# EAGLE board Regulator board_V1.0_Tiled (EAGLE 7.7.0)
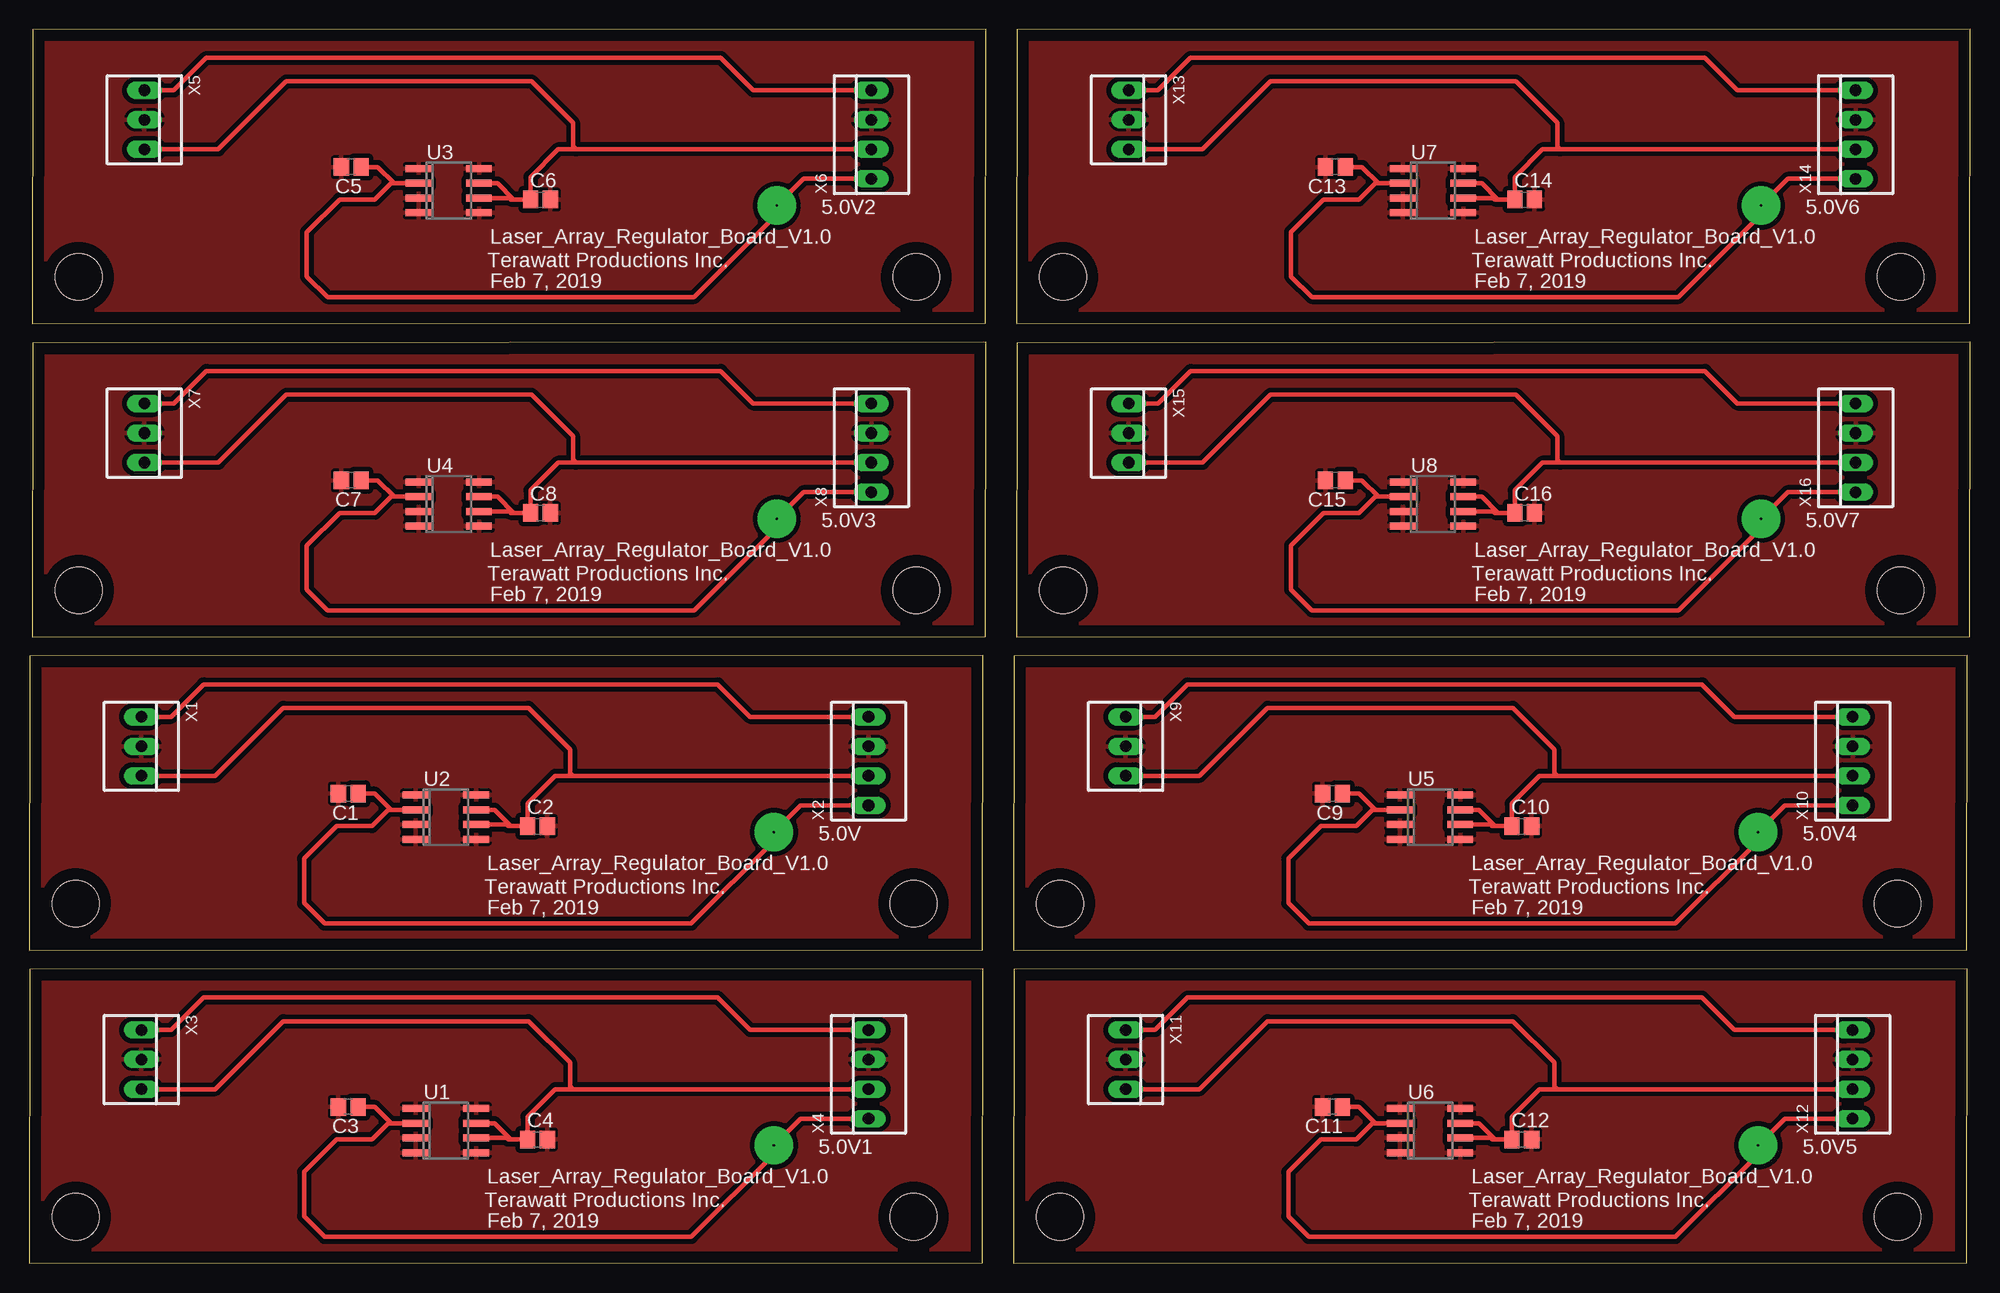
[diagram p0: board, top side]

Size 166.83 x 106.1 mm. Coordinates in mm from the lower left corner, seen from the top.
Outline: 0,26.92 81.92,26.97 82,52.25 0.08,52.2 0,26.92
Outline: 0,0 81.92,0.05 82,25.32 0.08,25.27 0,0
Outline: 0.25,80.77 82.17,80.82 82.25,106.1 0.33,106.04 0.25,80.77
Outline: 0.25,53.85 82.17,53.9 82.25,79.17 0.33,79.12 0.25,53.85
Outline: 84.58,26.92 166.5,26.97 166.58,52.25 84.66,52.2 84.58,26.92
Outline: 84.58,0 166.5,0.05 166.58,25.32 84.66,25.27 84.58,0
Outline: 84.84,80.77 166.76,80.82 166.83,106.1 84.91,106.04 84.84,80.77
Outline: 84.84,53.85 166.76,53.9 166.83,79.17 84.91,79.12 84.84,53.85
Copper layers (1*16): Top 0.035mm / dielectric 1.5mm / Bottom 0.035mm
Design rules "default *": minimum track width 10mil, minimum drill 24mil, track to track 16mil, track to pad 14mil, pad to pad 14mil, via to via 14mil, smd to smd 14mil, copper to edge 40mil, drill to drill 8mil, minimum pad ring 10mil, minimum via ring 8mil, stop-mask expansion 4mil, vias tented up to drill 0mil, thermal gap 10mil
Holes 4 mm at 4.01,30.94 76,30.94 4.01,4.01 76,4.01 4.27,84.79 76.25,84.79 4.27,57.86 76.25,57.86 88.6,30.94 160.58,30.94 88.6,4.01 160.58,4.01 88.85,84.79 160.83,84.79 88.85,57.86 160.83,57.86

## Footprints (pad centres in the part's own frame; a part is rotated, then mirrored left to right if it is on the bottom)
CONTACT-2MM = drill 0.2 pad 3.3: 1 0,0
C0805 = smd 1.3 x 1.5: 1 -0.85,0; 2 0.85,0
SOIC8 = smd 0.6 x 2.2: 1 -1.905,-2.6; 2 -0.635,-2.6; 3 0.635,-2.6; 4 1.905,-2.6; 5 1.905,2.6; 6 0.635,2.6; 7 -0.635,2.6; 8 -1.905,2.6
22-23-2031 = drill 1 long: 1 -2.54,0; 2 0,0; 3 2.54,0
22-23-2041 = drill 1 long: 1 -3.81,0; 2 -1.27,0; 3 1.27,0; 4 3.81,0

## Placement (x,y rotation side)
5.0V  CONTACT-2MM  [CONTACT-2MM]  64.01,37.08 0 top
5.0V1  CONTACT-2MM  [CONTACT-2MM]  64.01,10.16 0 top
5.0V2  CONTACT-2MM  [CONTACT-2MM]  64.26,90.93 0 top
5.0V3  CONTACT-2MM  [CONTACT-2MM]  64.26,64.01 0 top
5.0V4  CONTACT-2MM  [CONTACT-2MM]  148.59,37.08 0 top
5.0V5  CONTACT-2MM  [CONTACT-2MM]  148.59,10.16 0 top
5.0V6  CONTACT-2MM  [CONTACT-2MM]  148.84,90.93 0 top
5.0V7  CONTACT-2MM  [CONTACT-2MM]  148.84,64.01 0 top
C1  1uF  [C0805]  27.43,40.39 180 top
C2  1uF  [C0805]  43.69,37.59 0 top
C3  1uF  [C0805]  27.43,13.46 180 top
C4  1uF  [C0805]  43.69,10.67 0 top
C5  1uF  [C0805]  27.69,94.23 180 top
C6  1uF  [C0805]  43.94,91.44 0 top
C7  1uF  [C0805]  27.69,67.31 180 top
C8  1uF  [C0805]  43.94,64.52 0 top
C9  1uF  [C0805]  112.01,40.39 180 top
C10  1uF  [C0805]  128.27,37.59 0 top
C11  1uF  [C0805]  112.01,13.46 180 top
C12  1uF  [C0805]  128.27,10.67 0 top
C13  1uF  [C0805]  112.27,94.23 180 top
C14  1uF  [C0805]  128.52,91.44 0 top
C15  1uF  [C0805]  112.27,67.31 180 top
C16  1uF  [C0805]  128.52,64.52 0 top
U1  VOLTAGE_REG_APD1154ADL  [SOIC8]  35.81,11.43 270 top
U2  VOLTAGE_REG_APD1154ADL  [SOIC8]  35.81,38.35 270 top
U3  VOLTAGE_REG_APD1154ADL  [SOIC8]  36.07,92.2 270 top
U4  VOLTAGE_REG_APD1154ADL  [SOIC8]  36.07,65.28 270 top
U5  VOLTAGE_REG_APD1154ADL  [SOIC8]  120.4,38.35 270 top
U6  VOLTAGE_REG_APD1154ADL  [SOIC8]  120.4,11.43 270 top
U7  VOLTAGE_REG_APD1154ADL  [SOIC8]  120.65,92.2 270 top
U8  VOLTAGE_REG_APD1154ADL  [SOIC8]  120.65,65.28 270 top
X1  22-23-2031  [22-23-2031]  9.65,44.45 270 top
X2  22-23-2041  [22-23-2041]  72.14,43.18 90 top
X3  22-23-2031  [22-23-2031]  9.65,17.53 270 top
X4  22-23-2041  [22-23-2041]  72.14,16.26 90 top
X5  22-23-2031  [22-23-2031]  9.91,98.3 270 top
X6  22-23-2041  [22-23-2041]  72.39,97.03 90 top
X7  22-23-2031  [22-23-2031]  9.91,71.37 270 top
X8  22-23-2041  [22-23-2041]  72.39,70.1 90 top
X9  22-23-2031  [22-23-2031]  94.23,44.45 270 top
X10  22-23-2041  [22-23-2041]  156.72,43.18 90 top
X11  22-23-2031  [22-23-2031]  94.23,17.53 270 top
X12  22-23-2041  [22-23-2041]  156.72,16.26 90 top
X13  22-23-2031  [22-23-2031]  94.49,98.3 270 top
X14  22-23-2041  [22-23-2041]  156.97,97.03 90 top
X15  22-23-2031  [22-23-2031]  94.49,71.37 270 top
X16  22-23-2041  [22-23-2041]  156.97,70.1 90 top

## Library data of the parts
5.0V 5.0V1-5.0V7 U1-U8 = Mine
C1-C16 = adafruit
X1 X3 X5 X7 X9 X11 X13 X15 = Mine; MF: MOLEX; MPN: 22-23-2031; OC_FARNELL: 1462950; OC_NEWARK: 30C0862
X2 X4 X6 X8 X10 X12 X14 X16 = Mine; MF: MOLEX; MPN: 22-23-2041; OC_FARNELL: 1462920; OC_NEWARK: 38C0355

## Nets
GND: C1.2 C2.2 U2.1 U2.3 U2.4 U2.5 U2.8 X1.2 X2.3
GND1: C3.2 C4.2 U1.1 U1.3 U1.4 U1.5 U1.8 X3.2 X4.3
GND2: C5.2 C6.2 U3.1 U3.3 U3.4 U3.5 U3.8 X5.2 X6.3
GND3: C7.2 C8.2 U4.1 U4.3 U4.4 U4.5 U4.8 X7.2 X8.3
GND4: C9.2 C10.2 U5.1 U5.3 U5.4 U5.5 U5.8 X9.2 X10.3
GND5: C11.2 C12.2 U6.1 U6.3 U6.4 U6.5 U6.8 X11.2 X12.3
GND6: C13.2 C14.2 U7.1 U7.3 U7.4 U7.5 U7.8 X13.2 X14.3
GND7: C15.2 C16.2 U8.1 U8.3 U8.4 U8.5 U8.8 X15.2 X16.3
N$1: X1.1 X2.4
N$2: C2.1 U2.6 U2.7 X1.3 X2.2
N$4: 5.0V.1 C1.1 U2.2 X2.1
N$16: X3.1 X4.4
N$17: C4.1 U1.6 U1.7 X3.3 X4.2
N$18: 5.0V1.1 C3.1 U1.2 X4.1
N$31: X5.1 X6.4
N$32: C6.1 U3.6 U3.7 X5.3 X6.2
N$33: 5.0V2.1 C5.1 U3.2 X6.1
N$46: X7.1 X8.4
N$47: C8.1 U4.6 U4.7 X7.3 X8.2
N$48: 5.0V3.1 C7.1 U4.2 X8.1
N$61: X9.1 X10.4
N$62: C10.1 U5.6 U5.7 X9.3 X10.2
N$63: 5.0V4.1 C9.1 U5.2 X10.1
N$76: X11.1 X12.4
N$77: C12.1 U6.6 U6.7 X11.3 X12.2
N$78: 5.0V5.1 C11.1 U6.2 X12.1
N$91: X13.1 X14.4
N$92: C14.1 U7.6 U7.7 X13.3 X14.2
N$93: 5.0V6.1 C13.1 U7.2 X14.1
N$106: X15.1 X16.4
N$107: C16.1 U8.6 U8.7 X15.3 X16.2
N$108: 5.0V7.1 C15.1 U8.2 X16.1

## Tracks (layer width: path | path; a pad name or v marks a point on that pad's centre or on a via)
GND
  pour Top: 0,52.32 81.79,52.32 81.79,26.92 0,26.92
GND1
  pour Top: 0,25.4 81.79,25.4 81.79,0 0,0
GND2
  pour Top: 0.25,106.17 82.04,106.17 82.04,80.77 0.25,80.77
GND3
  pour Top: 0.25,79.25 82.04,79.25 82.04,53.85 0.25,53.85
GND4
  pour Top: 84.58,52.32 166.37,52.32 166.37,26.92 84.58,26.92
GND5
  pour Top: 84.58,25.4 166.37,25.4 166.37,0 84.58,0
GND6
  pour Top: 84.84,106.17 166.62,106.17 166.62,80.77 84.84,80.77
GND7
  pour Top: 84.84,79.25 166.62,79.25 166.62,53.85 84.84,53.85
N$1
  Top 0.406: X1.1 12.19,46.99 14.99,49.78 59.18,49.78 61.98,46.99 X2.4
N$2
  Top 0.406: X2.2 46.74,41.91 | 46.74,41.91 45.21,41.91 42.84,39.54 C2.1 41.4,37.59 | X1.3 16,41.91 21.84,47.75 42.93,47.75 46.48,44.2 46.48,42.16 46.74,41.91 | U2.6 41.02,37.72 41.15,37.59 41.4,37.59 | U2.7 40.01,38.99 41.4,37.59
N$4
  Top 0.406: U2.2 31.11,38.99 | 31.11,38.99 29.72,40.39 C1.1 | 31.11,38.99 30.86,38.99 29.46,37.59 26.42,37.59 23.62,34.8 23.62,30.99 25.4,29.21 56.9,29.21 64.01,36.32 5.0V.1 66.29,39.37 X2.1
N$16
  Top 0.406: X3.1 12.19,20.07 14.99,22.86 59.18,22.86 61.98,20.07 X4.4
N$17
  Top 0.406: X4.2 46.74,14.99 | 46.74,14.99 45.21,14.99 42.84,12.61 C4.1 41.4,10.67 | X3.3 16,14.99 21.84,20.83 42.93,20.83 46.48,17.27 46.48,15.24 46.74,14.99 | U1.6 41.02,10.79 41.15,10.67 41.4,10.67 | U1.7 40.01,12.06 41.4,10.67
N$18
  Top 0.406: U1.2 31.11,12.06 | 31.11,12.06 29.72,13.46 C3.1 | 31.11,12.06 30.86,12.06 29.46,10.67 26.42,10.67 23.62,7.87 23.62,4.06 25.4,2.29 56.9,2.29 64.01,9.4 5.0V1.1 66.29,12.45 X4.1
N$31
  Top 0.406: X5.1 12.45,100.84 15.24,103.63 59.44,103.63 62.23,100.84 X6.4
N$32
  Top 0.406: X6.2 46.99,95.76 | 46.99,95.76 45.47,95.76 43.09,93.38 C6.1 41.66,91.44 | X5.3 16.26,95.76 22.1,101.6 43.18,101.6 46.74,98.04 46.74,96.01 46.99,95.76 | U3.6 41.27,91.57 41.4,91.44 41.66,91.44 | U3.7 40.26,92.84 41.66,91.44
N$33
  Top 0.406: U3.2 31.37,92.84 | 31.37,92.84 29.97,94.23 C5.1 | 31.37,92.84 31.11,92.84 29.72,91.44 26.67,91.44 23.88,88.65 23.88,84.84 25.65,83.06 57.15,83.06 64.26,90.17 5.0V2.1 66.55,93.22 X6.1
N$46
  Top 0.406: X7.1 12.45,73.91 15.24,76.71 59.44,76.71 62.23,73.91 X8.4
N$47
  Top 0.406: X8.2 46.99,68.83 | 46.99,68.83 45.47,68.83 43.09,66.46 C8.1 41.66,64.52 | X7.3 16.26,68.83 22.1,74.68 43.18,74.68 46.74,71.12 46.74,69.09 46.99,68.83 | U4.6 41.27,64.64 41.4,64.52 41.66,64.52 | U4.7 40.26,65.91 41.66,64.52
N$48
  Top 0.406: U4.2 31.37,65.91 | 31.37,65.91 29.97,67.31 C7.1 | 31.37,65.91 31.11,65.91 29.72,64.52 26.67,64.52 23.88,61.72 23.88,57.91 25.65,56.13 57.15,56.13 64.26,63.25 5.0V3.1 66.55,66.29 X8.1
N$61
  Top 0.406: X9.1 96.77,46.99 99.57,49.78 143.76,49.78 146.56,46.99 X10.4
N$62
  Top 0.406: X10.2 131.32,41.91 | 131.32,41.91 129.79,41.91 127.42,39.54 C10.1 125.98,37.59 | X9.3 100.58,41.91 106.43,47.75 127.51,47.75 131.06,44.2 131.06,42.16 131.32,41.91 | U5.6 125.6,37.72 125.73,37.59 125.98,37.59 | U5.7 124.59,38.99 125.98,37.59
N$63
  Top 0.406: U5.2 115.7,38.99 | 115.7,38.99 114.3,40.39 C9.1 | 115.7,38.99 115.44,38.99 114.05,37.59 111,37.59 108.2,34.8 108.2,30.99 109.98,29.21 141.48,29.21 148.59,36.32 5.0V4.1 150.88,39.37 X10.1
N$76
  Top 0.406: X11.1 96.77,20.07 99.57,22.86 143.76,22.86 146.56,20.07 X12.4
N$77
  Top 0.406: X12.2 131.32,14.99 | 131.32,14.99 129.79,14.99 127.42,12.61 C12.1 125.98,10.67 | X11.3 100.58,14.99 106.43,20.83 127.51,20.83 131.06,17.27 131.06,15.24 131.32,14.99 | U6.6 125.6,10.79 125.73,10.67 125.98,10.67 | U6.7 124.59,12.06 125.98,10.67
N$78
  Top 0.406: U6.2 115.7,12.06 | 115.7,12.06 114.3,13.46 C11.1 | 115.7,12.06 115.44,12.06 114.05,10.67 111,10.67 108.2,7.87 108.2,4.06 109.98,2.29 141.48,2.29 148.59,9.4 5.0V5.1 150.88,12.45 X12.1
N$91
  Top 0.406: X13.1 97.03,100.84 99.82,103.63 144.02,103.63 146.81,100.84 X14.4
N$92
  Top 0.406: X14.2 131.57,95.76 | 131.57,95.76 130.05,95.76 127.67,93.38 C14.1 126.24,91.44 | X13.3 100.84,95.76 106.68,101.6 127.76,101.6 131.32,98.04 131.32,96.01 131.57,95.76 | U7.6 125.86,91.57 125.98,91.44 126.24,91.44 | U7.7 124.84,92.84 126.24,91.44
N$93
  Top 0.406: U7.2 115.95,92.84 | 115.95,92.84 114.55,94.23 C13.1 | 115.95,92.84 115.7,92.84 114.3,91.44 111.25,91.44 108.46,88.65 108.46,84.84 110.24,83.06 141.73,83.06 148.84,90.17 5.0V6.1 151.13,93.22 X14.1
N$106
  Top 0.406: X15.1 97.03,73.91 99.82,76.71 144.02,76.71 146.81,73.91 X16.4
N$107
  Top 0.406: X16.2 131.57,68.83 | 131.57,68.83 130.05,68.83 127.67,66.46 C16.1 126.24,64.52 | X15.3 100.84,68.83 106.68,74.68 127.76,74.68 131.32,71.12 131.32,69.09 131.57,68.83 | U8.6 125.86,64.64 125.98,64.52 126.24,64.52 | U8.7 124.84,65.91 126.24,64.52
N$108
  Top 0.406: U8.2 115.95,65.91 | 115.95,65.91 114.55,67.31 C15.1 | 115.95,65.91 115.7,65.91 114.3,64.52 111.25,64.52 108.46,61.72 108.46,57.91 110.24,56.13 141.73,56.13 148.84,63.25 5.0V7.1 151.13,66.29 X16.1

## Text on the board
tPlace: Laser_Array_Regulator_Board_V1.0 | Laser_Array_Regulator_Board_V1.0 | Terawatt Productions Inc. | Terawatt Productions Inc. | Feb 7, 2019 | Feb 7, 2019 | Laser_Array_Regulator_Board_V1.0 | Laser_Array_Regulator_Board_V1.0 | Terawatt Productions Inc. | Terawatt Productions Inc. | Feb 7, 2019 | Feb 7, 2019 | Laser_Array_Regulator_Board_V1.0 | Laser_Array_Regulator_Board_V1.0 | Terawatt Productions Inc. | Terawatt Productions Inc. | Feb 7, 2019 | Feb 7, 2019 | Laser_Array_Regulator_Board_V1.0 | Laser_Array_Regulator_Board_V1.0 | Terawatt Productions Inc. | Terawatt Productions Inc. | Feb 7, 2019 | Feb 7, 2019